# EAGLE board Container (4) (EAGLE 9.6.2)
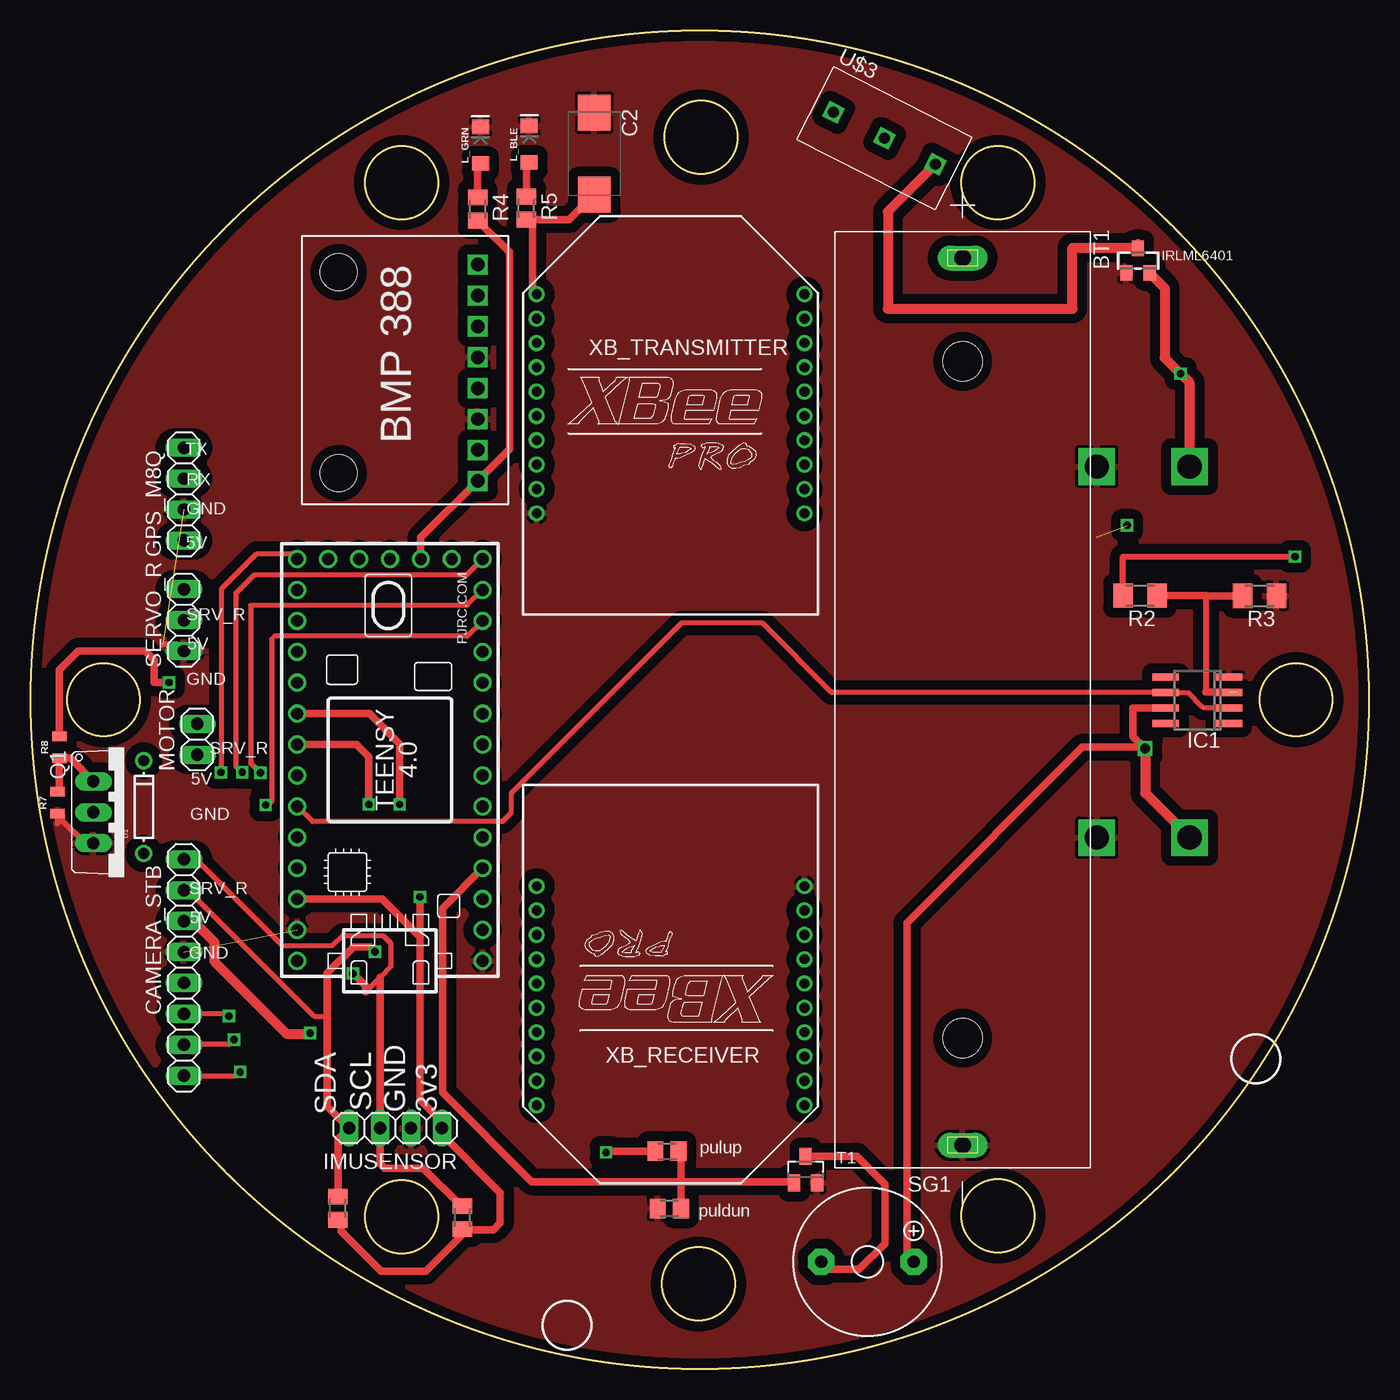
[diagram p0: board, top side]
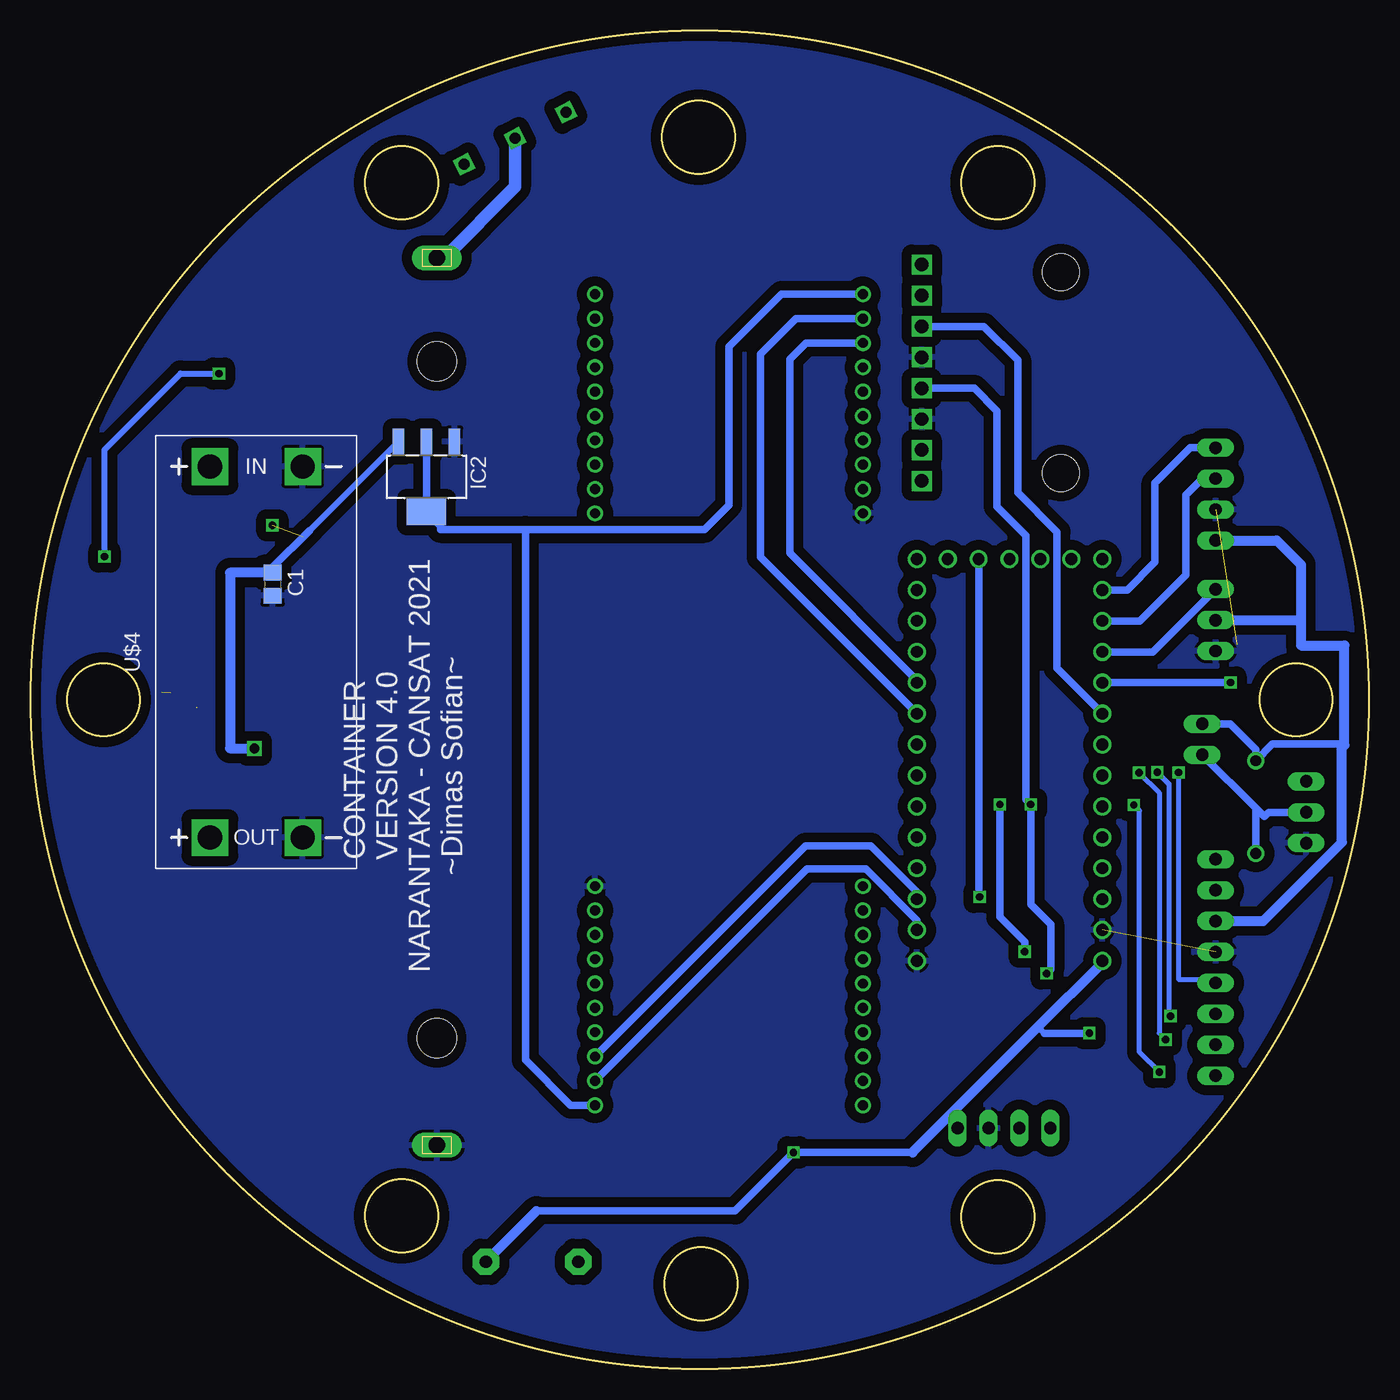
[diagram p1: board, bottom side, seen from below]

Size 110 x 110 mm. Coordinates in mm from the lower left corner, seen from the top.
Outline: circle at 55,55 radius 55
Outline: circle at 104,55 radius 3
Outline: circle at 79.5,97.5 radius 3
Outline: circle at 30.5,97.5 radius 3
Outline: circle at 6,55 radius 3
Outline: circle at 30.5,12.5 radius 3
Outline: circle at 79.5,12.6 radius 3
Outline: circle at 55.1,101.22 radius 3
Outline: circle at 54.9,7 radius 3
Copper layers (1*16): Top 0.035mm / dielectric 1.5mm / Bottom 0.035mm
Design rules "default *": minimum track width 6mil, minimum drill 0.6mm, track to track 6mil, track to pad 6mil, pad to pad 6mil, via to via 6mil, smd to smd 6mil, copper to edge 6mil, drill to drill 6mil, minimum pad ring 10mil, minimum via ring 8mil, stop-mask expansion 4mil, vias tented up to drill 0mil, thermal gap 10mil

## Footprints (pad centres in the part's own frame; a part is rotated, then mirrored left to right if it is on the bottom)
BAT_BK-18650-PC2 = drill 1.38 long: + -36.3,0; - 36.6,0 | hole 3.2: -27.805,0; 27.81,0
C0805 = smd 1.3 x 1.5: 1 -0.95,0; 2 0.95,0
D/7343-31W = smd 2.95 x 2.7: + 3.375,0; - -3.375,0
1X08 = drill 1.016 long: 1 -8.89,0; 2 -6.35,0; 3 -3.81,0; 4 -1.27,0; 5 1.27,0; 6 3.81,0; 7 6.35,0; 8 8.89,0
DO-1N4148 = drill 0.9: A -3.81,0; C 3.81,0
1X04 = drill 1.016 long: 1 -3.81,0; 2 -1.27,0; 3 1.27,0; 4 3.81,0
SO08 = smd 0.6 x 2.2: 1 -1.905,-2.6; 2 -0.635,-2.6; 3 0.635,-2.6; 4 1.905,-2.6; 5 1.905,2.6; 6 0.635,2.6; 7 -0.635,2.6; 8 -1.905,2.6
SOT223 = smd 0.95 x 2.15: 1 -2.3,-2.9; 2 0,-2.9; 3 2.3,-2.9 | smd 3.25 x 2.15: 4 0,2.9
SOT23-WIDE = smd 1 x 1.27: 1 -0.95,-1; 2 0.95,-1; 3 0,1
LED-1206 = smd 1.2 x 1.4: A -1.5,0; C 1.5,0
1X02 = drill 1.016 long: 1 -1.27,0; 2 1.27,0
M0805 = smd 1.3 x 1.6: 1 -0.95,0; 2 0.95,0
TO220V = drill 1.016 long: 1 -2.54,-2.54; 2 0,-2.54; 3 2.54,-2.54
M1206 = smd 1.6 x 2: 1 -1.4,0; 2 1.4,0
0805 = smd 0.8 x 1.2: 1 -0.9,0; 2 0.9,0
1X03 = drill 1.016 long: 1 -2.54,0; 2 0,0; 3 2.54,0
F/TMB = drill 1.016 pad 2.159 octagon: + 3.81,0; - -3.81,0
SOT23 = smd 1 x 1.4: 1 -0.95,-1.1; 2 0.95,-1.1; 3 0,1.1
TEENSY_4.0-BASIC = drill 0.965: 0/RX -13.97,-7.62; 1/TX -11.43,-7.62; 2 -8.89,-7.62; 3/CANTX -6.35,-7.62; 3V3_LN 16.51,-2.54; 3V3_LO -11.43,7.62; 4/CANRX -3.81,-7.62; 5 -1.27,-7.62; 6 1.27,-7.62; 7 3.81,-7.62; 8 6.35,-7.62; 9/CS 8.89,-7.62; 10/CS 11.43,-7.62; 11/MOSI 13.97,-7.62; 12/MISO 16.51,-7.62; 13/SCK 16.51,7.62; 14/A0 13.97,7.62; 15/A1 11.43,7.62; 16/A2 8.89,7.62; 17/A3 6.35,7.62; 18/A4/SDA 3.81,7.62; 19/A5/SCL 1.27,7.62; 20/A6 -1.27,7.62; 21/A7 -3.81,7.62; 22/A8 -6.35,7.62; 23/A9 -8.89,7.62; GND -16.51,-7.62; GND2 -13.97,7.62; GND3 16.51,0; ON/OFF 16.51,5.08; PROG 16.51,2.54; VBAT\ 16.51,-5.08; VIN -16.51,7.62
BMP388 = drill 1.1 square: 3VO 4.44,2.54; CS 17.14,2.54; GND 6.98,2.54; INT 19.68,2.54; SCK 9.52,2.54; SDI 14.6,2.54; SDO 12.06,2.54; VIN 1.9,2.54 | hole 3: 2.54,13.97; 19.05,13.97
SS12D0X = drill 0.9 square: 1 -4.7,0; 2 0,0; 3 4.7,0
DC-DC-STEP-UP-MT3608 = drill 2 pad 2.8 square: IN+ 15.24,3.81; IN- 15.24,-3.81; OUT+ -15.24,3.81; OUT- -15.24,-3.81
XBEE-PRO = drill 0.8 pad 1.27: 1 -11,9; 2 -11,7; 3 -11,5; 4 -11,3; 5 -11,1; 6 -11,-1; 7 -11,-3; 8 -11,-5; 9 -11,-7; 10 -11,-9; 11 11,-9; 12 11,-7; 13 11,-5; 14 11,-3; 15 11,-1; 16 11,1; 17 11,3; 18 11,5; 19 11,7; 20 11,9

## Placement (x,y rotation side)
BT1  BK-18650-PC2  [BAT_BK-18650-PC2]  76.6,55 270 top
C1  100nF  [C0805]  90.09,64.5 270 bottom
C2  330uF  [D/7343-31W]  46.33,99.88 270 top
CAMERA_STB  [1X08]  12.6,33 90 top
D1  [DO-1N4148]  9.32,46.18 90 top
GPS_M8Q  [1X04]  12.6,71.9 90 top
IC1  LM741D  [SO08]  95.88,54.96 90 top
IC2  LM1117MP-3.3  [SOT223]  77.45,73.32 180 bottom
IMUSENSOR  [1X04]  30,19.8 180 top
IRLML6401  [SOT23-WIDE]  91.01,91.09 0 top
L_BLE  [LED-1206]  40.98,100.64 90 top
L_GRN  [LED-1206]  36.98,100.56 90 top
MOTOR  [1X02]  13.71,51.75 90 top
PULLDOWN  10K  [M0805]  52.5,13.2 0 top
PULLUP  10K  [M0805]  52.3,17.9 180 top
Q1  FQP30N06L  [TO220V]  7.7,45.75 270 top
R2  1M  [M1206]  91.18,63.56 180 top
R3  100K  [M1206]  100.99,63.54 180 top
R4  330  [M0805]  36.76,95.32 270 top
R5  330  [M0805]  40.76,95.4 270 top
R6  10K  [M0805]  25.25,13.22 270 top
R7  10k  [0805]  2.23,46.54 90 top
R8  100  [0805]  2.37,51.1 90 top
R9  10K  [M0805]  35.51,12.45 270 top
SERVO_R  [1X03]  12.61,61.54 90 top
SG1  F/TMB  [F/TMB]  68.78,8.82 0 top
T1  2N7002E  [SOT23]  63.7,16.4 0 top
U$1  TEENSY_4.0-BASIC  [TEENSY_4.0-BASIC]  29.54,50.05 90 top
U$2  BMP388  [BMP388]  39.29,71.08 90 top
U$3  SS120DX  [SS12D0X]  70.18,101.14 333 top
U$4  DC-DC-STEP-UP-MT3608  [DC-DC-STEP-UP-MT3608]  91.44,58.92 90 bottom
XB_RECEIVER  XBEE-PRO  [XBEE-PRO]  52.6,30.68 180 top
XB_TRANSMITTER  XBEE-PRO  [XBEE-PRO]  52.6,79.32 0 top

## Library data of the parts
BT1 = BK-18650-PC2; AVAILABILITY: Warning; DESCRIPTION: Battery Holder (Open) 18650 1 Cell PC Pin; MF: MPD (Memory Protection Devices); MP: BK-18650-PC2; PACKAGE: None; PRICE: None; PURCHASE-URL: https://pricing.snapeda.com/search/part/BK-18650-PC2/?ref=eda
C1 C2 = rcl; SPICEPREFIX: C
CAMERA_STB GPS_M8Q IMUSENSOR MOTOR SERVO_R = pinhead
D1 = adafruit
IC1 = linear
IC2 = lm1117_10; MF: Texas Instruments; MPN: LM1117MP-3.3; OC_FARNELL: 9778195; OC_NEWARK: 28X3416
IRLML6401 = microbuilder
L_BLE L_GRN = SparkFun-LED
PULLDOWN PULLUP R2-R6 R9 = rcl; SPICEPREFIX: R
Q1 = FQP30N06L; AVAILABILITY: In Stock; DESCRIPTION: N-Channel 60 V 32A (Tc) 79W (Tc) Through Hole TO-220-3; MF: ON Semiconductor; MP: FQP30N06L; PACKAGE: TO-220-3 ON Semiconductor; PRICE: None; PURCHASE-URL: https://pricing.snapeda.com/search/part/FQP30N06L/?ref=eda
R7 R8 = SparkFun-Resistors
SG1 = buzzer; OC_FARNELL: unknown; OC_NEWARK: unknown
T1 = nxp_60
U$1 = Teensy-4.0
U$2 U$3 = mario
U$4 = diy-modules
XB_RECEIVER XB_TRANSMITTER = xbee; MPN: XBP24-AWI-001; OC_FARNELL: 1337916; OC_NEWARK: 42M2667

## Nets
3.3V: C2.+ IC2.2 IC2.4 R5.2 XB_RECEIVER.1 XB_TRANSMITTER.1
3V3: IMUSENSOR.1 R4.2 R6.2 R9.2 U$1.3V3_LN U$1.3V3_LO U$2.VIN
5V: C1.1 CAMERA_STB.6 D1.C GPS_M8Q.1 IC1.7 IC2.3 MOTOR.2 PULLUP.2 SERVO_R.2 SG1.+ U$1.VIN U$4.OUT+
BUZZ: PULLDOWN.2 PULLUP.1 T1.1 U$1.2
CS: CAMERA_STB.1 U$1.10/CS
GND: BT1.- C1.2 C2.- CAMERA_STB.5 GPS_M8Q.2 IC1.4 IC2.1 IMUSENSOR.2 IRLML6401.1 L_BLE.C L_GRN.C PULLDOWN.1 Q1.3 R3.1 R7.1 SERVO_R.1 T1.2 U$1.GND U$1.GND2 U$2.GND U$2.SDO U$4.IN- U$4.OUT- XB_RECEIVER.10 XB_TRANSMITTER.10
INT: U$2.INT
MISO: CAMERA_STB.3 U$1.12/MISO
MOSI: CAMERA_STB.2 U$1.11/MOSI
N$1: IRLML6401.3 U$3.3
N$2: Q1.1 R7.2 R8.1
N$4: L_GRN.A R4.1
N$5: D1.A MOTOR.1 Q1.2
N$6: U$2.3VO
N$17: L_BLE.A R5.1
NSSS: BT1.+ U$3.2
RX1_XBEE: U$1.7 XB_TRANSMITTER.2
RX2_XBEE: U$1.0/RX XB_RECEIVER.2
RX_GPS: GPS_M8Q.3 U$1.15/A1
S: SG1.- T1.3
SCK: CAMERA_STB.4 U$1.13/SCK
SCL: CAMERA_STB.8 IMUSENSOR.3 R9.1 U$1.19/A5/SCL U$2.SCK
SDA: CAMERA_STB.7 IMUSENSOR.4 R6.1 U$1.18/A4/SDA U$2.SDI
SERVO_L: R8.2 U$1.17/A3
SERVO_R: SERVO_R.3 U$1.16/A2
TX1_XBEE: U$1.8 XB_TRANSMITTER.3
TX2_XBEE: U$1.1/TX XB_RECEIVER.3
TX_GPS: GPS_M8Q.4 U$1.14/A0
V_BATT: IRLML6401.2 R2.2 U$4.IN+
V_SENSE: IC1.2 IC1.6 U$1.21/A7
VB: IC1.3 R2.1 R3.2

## Tracks (layer width: path | path; a pad name or v marks a point on that pad's centre or on a via)
3.3V
  Top 0.61: XB_TRANSMITTER.1 41.26,88.66 41.26,93.95 R5.2 44.28,94.45 C2.+
  Bottom 0.61: 69.31,69 76.31,69 76.31,69.28 IC2.4 IC2.2 | 69.31,69 54.6,69 52.6,71 52.6,84 48.28,88.32 XB_TRANSMITTER.1 | XB_RECEIVER.1 65.6,21.68 69.31,25.4 69.31,69
3V3  (via drill 0.6)
  Top 0.61: R4.2 39.36,91.77 39.36,75.59 U$2.VIN 32.08,68.31 U$1.3V3_LN | R9.2 35.47,11.46 35.9,11.46 | 35.9,11.46 32.49,8.05 28.82,8.05 25.55,11.32 25.55,12.03 25.31,12.27 R6.2 | IMUSENSOR.1 33.81,20.3 32,22.11 32,35.5 | 32,35.5 28.88,38.62 U$1.3V3_LO | v32,38.8 32,35.5 | IMUSENSOR.1 33.89,19.8 | IMUSENSOR.1 33.81,19.28 38.6,14.49 38.6,12.02 38.04,11.46 35.9,11.46
  Bottom 0.61: U$1.3V3_LN 32.08,38.88 v32,38.8
5V  (via drill 0.6, 0.8)  (1 unrouted)
  Top 0.508: v22.99,27.6 22.95,27.55 21.86,27.55
  Top 0.61: IC1.7 90.6,54.33 90.6,52 v91.6,51 91.49,51.11 86.46,51.11 72.01,36.66 72.01,9.4 SG1.+ | PULLUP.2 47.4,17.9 v47.3,17.8
  Top 0.813: 72.69,8.22 72.59,8.32 SG1.+ | CAMERA_STB.6 13.38,36.81 15.1,35.09 15.1,33.5 21.05,27.55 22.95,27.55 | U$4.OUT+ 91.6,47.33 v91.6,51
  Bottom 0.508: IC2.3 87.06,68.92 87.6,68.37 | 26.67,27.6 27.2,28.12
  Bottom 0.61: 37.51,17.8 v47.3,17.8 52.1,13 68.41,13 | MOTOR.2 11.41,53.02 9.32,50.92 D1.C 7.94,51.36 2.23,51.36 | 2.12,51.36 2.03,51.27 | v22.99,27.6 26.67,27.6 | 87.06,68.92 90.12,65.85 90.12,65.59 90.09,65.56 C1.1
  Bottom 0.813: U$1.VIN 21.92,33.4 27.2,28.12 37.51,17.8 | 68.41,13 SG1.+ | SERVO_R.2 5.6,61.54 | GPS_M8Q.1 7.6,68.09 5.6,66.09 5.6,61.54 | 5.6,61.54 5.6,59.47 2.03,59.47 2.03,51.27 | 2.23,51.36 2.23,43.28 8.7,36.81 CAMERA_STB.6 | C1.1 93.6,65.45 93.6,51 v91.6,51
  other vias: 90.12,69.33
BUZZ
  Top 0.61: U$1.2 33.86,37.86 33.86,22.74 41.2,15.4 53.45,15.4 | PULLUP.1 53.45,17.7 53.45,15.6 | 53.45,15.6 53.45,15.4 | 53.45,15.4 PULLDOWN.2 | T1.1 62.65,15.4 53.65,15.4 53.45,15.6
CS  (via drill 0.6)
  Top 0.305: 20.04,60.22 19.83,60 | 19.83,46.62 19.57,46.36 v19.32,46.36
  Top 0.406: CAMERA_STB.1 16.93,24.11 v17.24,24.41 | 20.04,60.22 35.9,60.22 U$1.10/CS | 19.83,60 19.83,46.62
  Bottom 0.406: v17.24,24.41 18.86,26.03 18.86,45.89 v19.32,46.36
GND  (2 unrouted)
  Top 0.508: SERVO_R.1 12.09,59.52 10.88,59.52 | Q1.3 4.45,43.21 2.51,45.16 2.23,44.87 R7.1
  pour Bottom (isolate 0.813): -0.63,112.09 -0.63,-1.12 111.6,-1.12 111.6,112.09
  pour Top (isolate 0.813): -1.28,110.71 111.6,110.71 111.6,-1.11 -1.28,-1.11
MISO  (via drill 0.6)
  Top 0.305: 16.31,29.19 v16.31,29
  Top 0.406: 16.31,29.19 CAMERA_STB.3 | v17.4,49.03 16.88,49.55 16.88,63.73 18.43,65.27 35.87,65.27 U$1.12/MISO
  Bottom 0.305: 16.45,29.3 16.31,29.3 v16.31,29
  Bottom 0.406: v17.4,49.03 16.45,48.09 16.45,29.3
MOSI  (via drill 0.6)
  Top 0.305: CAMERA_STB.2 12.62,26.67 | 16.69,27.07 v16.71,27.07 | v18.89,49 18.89,49.02 | 37.14,64.02 U$1.11/MOSI
  Top 0.406: 12.62,26.67 16.29,26.67 16.69,27.07 | 18.89,49.02 18.09,49.81 18.09,62.78 35.89,62.78 37.14,64.02
  Bottom 0.305: 17.25,27.62 16.71,27.09 v16.71,27.07 | v18.89,49 18.87,49
  Bottom 0.406: 17.25,27.62 17.25,47.37 18.87,49
N$1
  Top 0.61: 91.01,92.58 IRLML6401.3
  Top 0.813: U$3.3 70.45,95.09 70.45,87.13 85.64,87.13 85.64,92.14 90.97,92.14 IRLML6401.3
N$2
  Top 0.61: Q1.1 3.26,50.2 R8.1 2.37,47.59 R7.2
N$4
  Top 0.61: L_GRN.A 36.76,98.84 R4.1
N$5
  Bottom 0.61: MOTOR.1 9.32,46.09 | 9.32,46.09 8.62,45.39 8.26,45.75 Q1.2 | 9.32,46.09 D1.A
N$17
  Top 0.61: L_BLE.A 40.76,98.92 R5.1
NSSS
  Bottom 1.016: BT1.+ 76.02,91.3 70.18,97.14 U$3.2
RX1_XBEE
  Bottom 0.61: XB_TRANSMITTER.2 47.11,86.32 50.01,83.41 50.01,66.71 U$1.7
RX2_XBEE
  Bottom 0.61: XB_RECEIVER.2 46.2,41.08 41.36,41.08 37.16,36.88 U$1.0/RX
RX_GPS
  Bottom 0.61: U$1.15/A1 18.83,61.48 15.06,65.25 15.06,71.8 13.69,73.17 GPS_M8Q.3
S
  Top 0.61: T1.3 67.9,17.5 70.2,15.2 70.2,10.3 68.1,8.2 65.59,8.2 SG1.-
SCK  (via drill 0.6)
  Top 0.305: v15.65,49.02 15.69,49.07
  Top 0.406: 15.69,49.07 15.69,64.09 18.6,67 21.48,67 U$1.13/SCK
  Bottom 0.305: CAMERA_STB.4 12.87,32 | 15.6,32 15.65,32.05
  Bottom 0.406: 12.87,32 15.6,32 | 15.65,32.05 v15.65,49.02
SCL  (via drill 0.6)
  Top 0.406: CAMERA_STB.8 13.61,41.89 20.7,34.8 24.81,34.8 25.63,35.63 28.97,35.63 29.6,35 29.6,33.07 28.73,32.2 27.53,31
  Top 0.61: U$1.19/A5/SCL 26.8,51.32 27.8,50.32 v27.8,46.4 | v26.5,32.5 27.53,31.48 27.53,31 | 28.73,32.2 IMUSENSOR.3 28.73,16.89 29.11,16.51 32.26,16.51 35.37,13.4 R9.1
  Bottom 0.61: v26.5,32.5 26.16,32.85 26.16,36.56 27.8,38.2 v27.8,46.4 28.19,46.79 28.19,68.5 30.58,70.89 30.58,78.73 32.45,80.6 U$2.SCK
SDA  (via drill 0.6)
  Top 0.406: CAMERA_STB.7 12.98,39.35 23.33,29 24.39,29
  Top 0.61: v30.34,46.4 30.34,51.37 27.85,53.86 U$1.18/A4/SDA | v28.3,34.3 27.9,34.7 26.55,34.7 24.39,32.54 24.39,29 24.39,21.6 IMUSENSOR.4 25.3,18.91 25.3,14.22 R6.1
  Bottom 0.61: v30.34,46.4 30.34,37.15 28.3,35.11 v28.3,34.3 | U$2.SDI 31.65,85.68 28.87,82.9 28.87,72.02 25.65,68.8 25.65,57.59 U$1.18/A4/SDA
SERVO_L  (via drill 0.6)
  Top 0.61: R8.2 2.37,57.43 3.93,58.99 9.44,58.99 10.17,58.26 10.17,56.41 v11.38,56.41
  Bottom 0.61: v11.38,56.41 U$1.17/A3
SERVO_R
  Bottom 0.61: U$1.16/A2 17.75,58.94 SERVO_R.3
TX1_XBEE
  Bottom 0.61: XB_TRANSMITTER.3 46.28,84.32 47.6,83 47.6,67.04 37.16,56.6 U$1.8
TX2_XBEE
  Bottom 0.61: XB_RECEIVER.3 46.3,42.98 40.92,42.98 37.16,39.22 U$1.1/TX
TX_GPS
  Bottom 0.61: U$1.14/A0 19.88,64.02 17.6,66.3 17.6,72.8 14.69,75.71 GPS_M8Q.4
V_BATT  (via drill 0.6)
  Top 0.508: R2.2 89.78,66.76 v103.91,66.76
  Top 0.813: IRLML6401.2 93.22,88.83 93.22,83.09 v94.5,81.81 95.25,81.06 U$4.IN+
  Bottom 0.508: v103.91,66.76 103.91,75.55 97.66,81.81 v94.5,81.81
V_SENSE  (1 unrouted)
  Top 0.406: IC1.2 96.4,54.33 | 96.36,54.36 95.13,55.59 IC1.6 65.84,55.59 60.14,61.3 53.5,61.3 39.5,47.3 39.5,45.7 38.79,44.99 23.17,44.99 U$1.21/A7
VB  (1 unrouted)
  Top 0.508: 96.6,63.56 96.6,63.54 96.6,55.62
  Top 0.61: R2.1 96.6,63.56 | 96.6,63.54 R3.2 | 96.6,55.62 99.2,55.62

## Text on the board
tPlace: TX | RX | GND | 5V | SRV_R | 5V | GND | SRV_R | 5V | GND | SRV_R | 5V | GND | pulup | puldun
bPlace: CONTAINER / VERSION 4.0 / NARANTAKA - CANSAT 2021 / ~Dimas Sofian~
tNames: SDA | SCL | GND | 3v3